# EAGLE board quadrotorDylan (EAGLE 5.06)
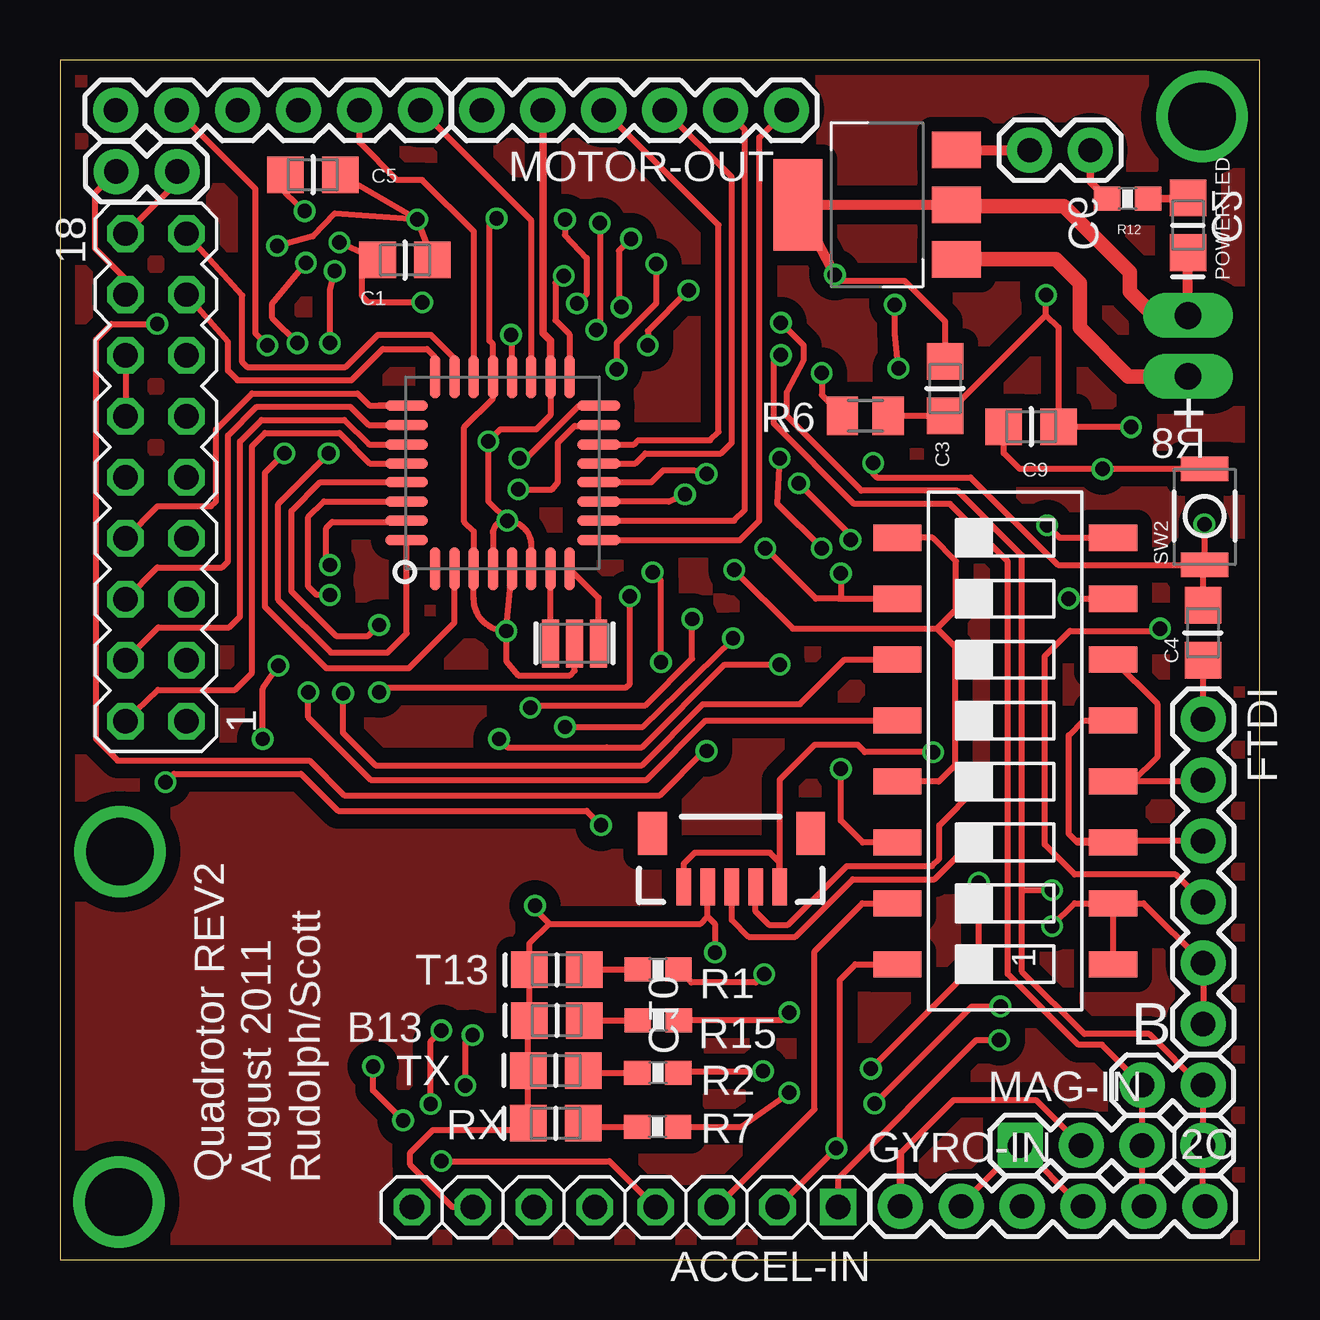
[diagram p0: board, top side]
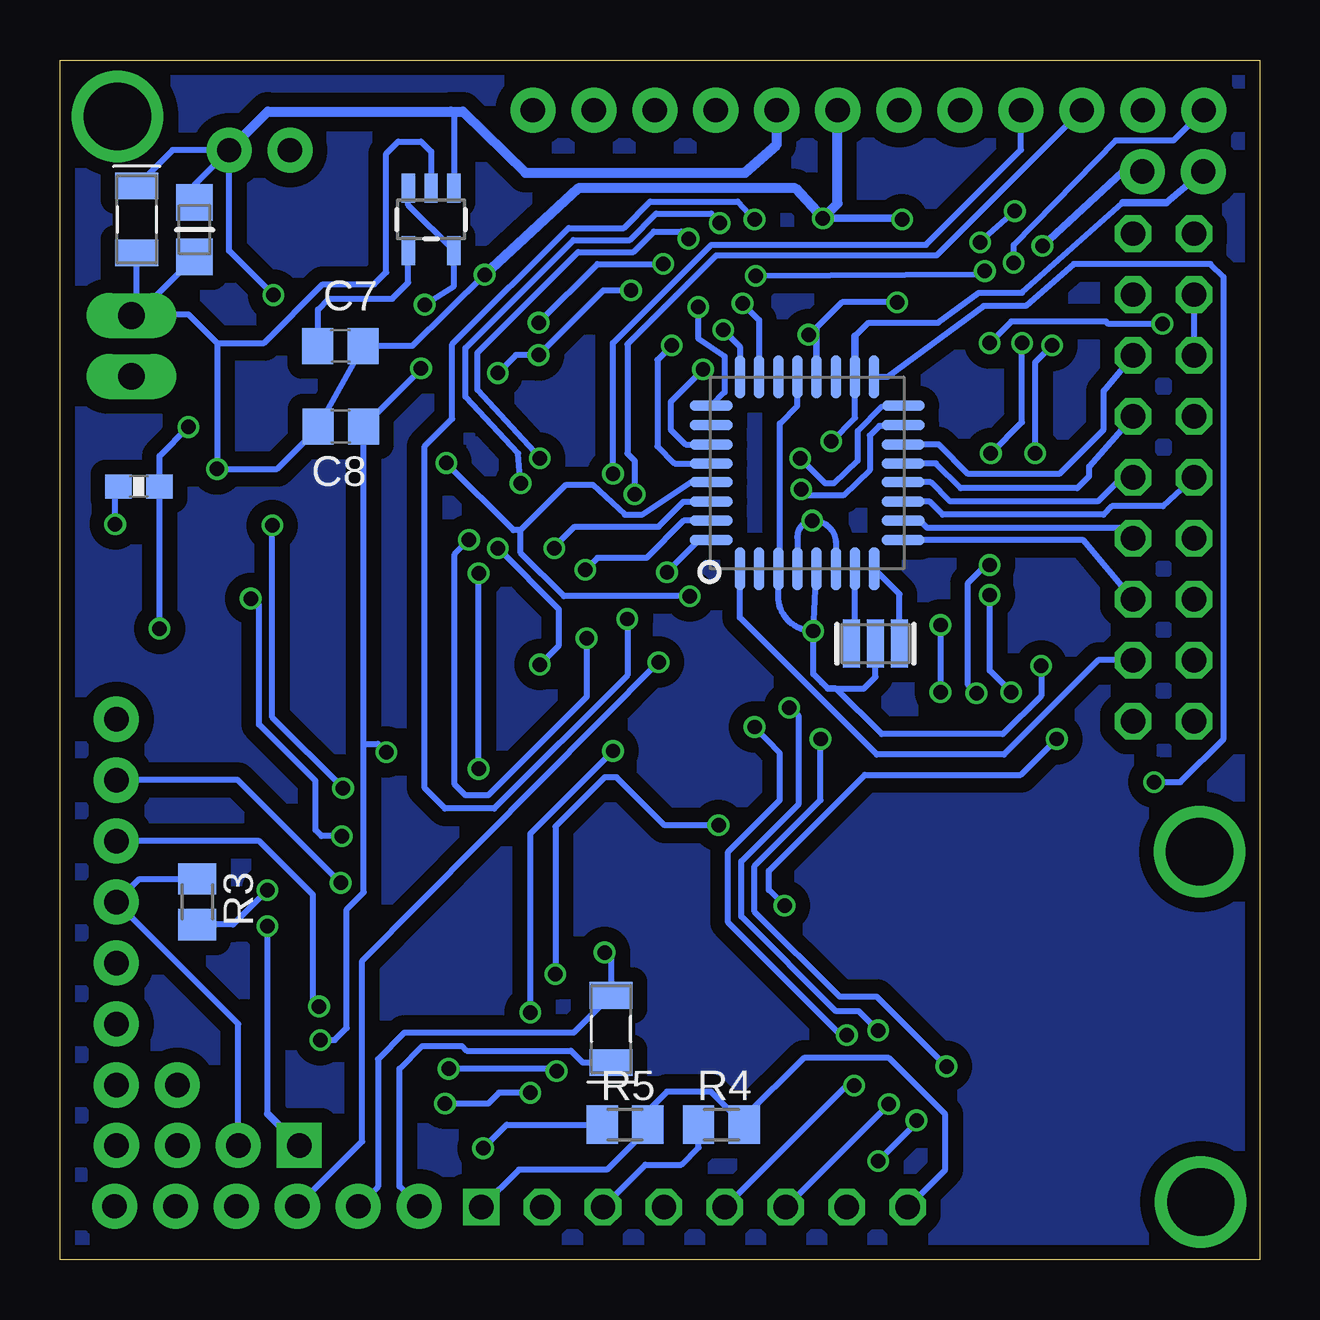
[diagram p1: board, bottom side, seen from below]

Size 50 x 50 mm. Coordinates in mm from the lower left corner, seen from the top.
Outline: 0,0 50,0 50,50 0,50 0,0
Copper layers (1*16): Top 0.035mm / dielectric 1.5mm / Bottom 0.035mm
Design rules "ITead_rule": minimum track width 6mil, minimum drill 12mil, track to track 6mil, track to pad 6mil, pad to pad 6mil, via to via 6mil, smd to smd 0mil, copper to edge 10mil, drill to drill 10mil, minimum pad ring 10mil, minimum via ring 6mil, stop-mask expansion 2mil, vias tented up to drill 100mil, thermal gap 10mil

## Footprints (pad centres in the part's own frame; a part is rotated, then mirrored left to right if it is on the bottom)
SOT223 = smd 1.524 x 2.032: 1 0,0; 2 2.286,0; 3 4.572,0 | smd 3.81 x 2.032: 4 2.286,6.604
1X08-S = drill 1.016 square: 1 -8.89,0 | drill 1.016 octagon: 2 -6.35,0; 3 -3.81,0; 4 -1.27,0; 5 1.27,0; 6 3.81,0; 7 6.35,0; 8 8.89,0
MA09-2 = drill 1.016 octagon: 1 -10.16,-1.27; 2 -10.16,1.27; 3 -7.62,-1.27; 4 -7.62,1.27; 5 -5.08,-1.27; 6 -5.08,1.27; 7 -2.54,-1.27; 8 -2.54,1.27; 9 0,-1.27; 10 0,1.27; 11 2.54,-1.27; 12 2.54,1.27; 13 5.08,-1.27; 14 5.08,1.27; 15 7.62,-1.27; 16 7.62,1.27; 17 10.16,-1.27; 18 10.16,1.27
CAP0805-NP = smd 1.524 x 1.524: 1 0,0; 2 2.286,0
TAN-A = smd 1.118 x 1.778: 1 0,0; 2 2.794,0
C0805 = smd 1.3 x 1.5: 1 -0.95,0; 2 0.95,0
LED0805 = smd 1.524 x 1.524: 1 0,0; 2 2.286,0
1X02_LONGPADS = drill 1.118 pad 1.88 long: 1 0,0; 2 2.54,0
1X06 = drill 1.016 pad 1.88 round: 1 0,0; 2 2.54,0; 3 5.08,0; 4 7.62,0; 5 10.16,0; 6 12.7,0
EM408_CON = smd 0.6 x 1.55: 1 4,0; 2 3,0; 3 2,0; 4 1,0; 5 0,0 | smd 1.2 x 1.8: P$1 -1.3,-2.225; P$2 5.3,-2.225
1X02 = drill 1.016 pad 1.88 round: 1 0,0; 2 2.54,0
1X04 = drill 1.016 pad 1.88 square: 1 0,0 | drill 1.016 pad 1.88 round: 2 2.54,0; 3 5.08,0; 4 7.62,0
0603-RES = smd 1.1 x 1: 1 -0.85,0; 2 0.85,0
M0805 = smd 1.3 x 1.6: 1 -0.95,0; 2 0.95,0
SMS-008 = smd 1.092 x 2.007: 1 -8.89,-4.496; 2 -6.35,-4.496; 3 -3.81,-4.496; 4 -1.27,-4.496; 5 1.27,-4.496; 6 3.81,-4.496; 7 6.35,-4.496; 8 8.89,-4.496; 9 8.89,4.496; 10 6.35,4.496; 11 3.81,4.496; 12 1.27,4.496; 13 -1.27,4.496; 14 -3.81,4.496; 15 -6.35,4.496; 16 -8.89,4.496
157SW = smd 1.016 x 1.981: 1 0,0; 2 4,0
QFP032 = smd 0.432 x 1.778: 1 0,0; 2 0.8,0; 3 1.599,0; 4 2.399,0; 5 3.199,0; 6 3.998,0; 7 4.798,0; 8 5.598,0; 17 5.588,8.001; 18 4.798,7.997; 19 3.998,7.997; 20 3.199,7.997; 21 2.399,7.997; 22 1.599,7.997; 23 0.799,7.997; 24 0,7.997 | smd 1.778 x 0.432: 9 6.807,1.194; 10 6.807,2.007; 11 6.807,2.794; 12 6.807,3.607; 13 6.807,4.394; 14 6.807,5.182; 15 6.807,5.994; 16 6.816,6.803; 25 -1.194,6.807; 26 -1.194,5.994; 27 -1.194,5.182; 28 -1.194,4.394; 29 -1.194,3.607; 30 -1.194,2.794; 31 -1.194,2.007; 32 -1.194,1.194
SOT23-5 = smd 0.55 x 1.2: 1 -0.95,-1.3; 2 0,-1.3; 3 0.95,-1.3; 4 0.95,1.3; 5 -0.95,1.3
RESONATOR = smd 0.7 x 2: 1 -1,0; 2 0,0; 3 1,0

## Placement (x,y rotation side)
5VREG  UA78M05  [SOT223]  37.36,41.68 90 top
ACCEL-IN  [1X08-S]  23.55,2.18 180 top
AUX-IO  [MA09-2]  4,32.6 90 top
C1  0.1uF  [CAP0805-NP]  13.24,41.66 0 top
C2  4.7uF  [TAN-A]  46.8,44.75 270 bottom
C3  0.1uF  [CAP0805-NP]  36.89,35.16 90 top
C4  0.1uF  [CAP0805-NP]  47.64,24.98 90 top
C5  0.1uF  [CAP0805-NP]  9.4,45.21 0 top
C6  0.1uF  [CAP0805-NP]  44.39,44.07 270 bottom
C7  470pF  [C0805]  38.31,38.08 0 bottom
C8  2.2uF  [C0805]  38.29,34.72 180 bottom
C9  0.1uF  [CAP0805-NP]  39.34,34.71 0 top
C10  4.7uF  [TAN-A]  27.03,8.21 90 bottom
COMM-LED  L_AMBER  [LED0805]  19.57,9.96 0 top
COMM-LED1  L_AMBER  [LED0805]  19.52,7.88 0 top
COMM-LED2  L_AMBER  [LED0805]  19.52,5.68 0 top
EXTERNAL-ON-OFF  [1X02_LONGPADS]  47.02,36.81 90 top
FTDI  [1X06]  47.65,22.52 270 top
GPS  EM408_CON  [EM408_CON]  30,15.54 180 top
GYRO-IN  [1X06]  35.02,2.22 0 top
I2C  [1X02]  47.65,7.27 180 top
JP1  [1X02]  40.41,46.24 0 top
MAG-IN  [1X04]  40.02,4.75 0 top
MOTOR-OUT  [1X06]  17.59,47.91 0 top
POWER-LED  BLUE  [LED0805]  47.02,41.97 90 top
R1  330  [0603-RES]  24.93,12.09 0 top
R2  330  [0603-RES]  24.92,7.79 0 top
R3  4.7k  [M0805]  44.28,14.91 90 bottom
R4  5k  [M0805]  22.43,5.62 0 bottom
R5  5k  [M0805]  26.45,5.62 0 bottom
R6  5k  [M0805]  33.57,35.17 0 top
R7  330  [0603-RES]  24.91,5.54 0 top
R8  1k  [0603-RES]  46.71,32.22 0 bottom
R12  330  [0603-RES]  44.5,44.22 0 top
R15  330  [0603-RES]  24.94,9.97 0 top
RECIEVER-POWER  [1X02]  4.88,45.35 180 top
RECIVER  [1X06]  15.03,47.91 180 top
S1  SWS008  [SMS-008]  39.4,21.2 90 top
SENSOR-LED2  L_AMBER  [LED0805]  19.57,12.08 0 top
SW2  RESET  [157SW]  47.71,28.96 90 top
U1  ATMEGA168-20AU  [QFP032]  15.64,28.79 0 top
U2  V_REG_LDOSMD  [SOT23-5]  34.53,43.35 180 bottom
U4  ATMEGA168-20AU  [QFP032]  21.66,28.79 0 bottom
Y1  16MHz  [RESONATOR]  21.45,25.68 0 top
Y2  16MHz  [RESONATOR]  16.01,25.67 0 bottom

## Library data of the parts
5VREG C1-C6 C9 C10 COMM-LED COMM-LED1 COMM-LED2 POWER-LED SENSOR-LED2 SW2 U1 U4 = MySMD
ACCEL-IN = pinhead-2
AUX-IO = con-lstb; OC_FARNELL: unknown; OC_NEWARK: unknown
C7 C8 = rcl
EXTERNAL-ON-OFF FTDI GPS GYRO-IN I2C JP1 MAG-IN MOTOR-OUT R1 R2 R7 R8 R12 R15 RECIEVER-POWER RECIVER U2 = SparkFun
R3-R6 = resistor
S1 = smd-special
Y1 Y2 = MySMD2

## Nets
2D13/SCK: R15.2 U1.17
3V3: ACCEL-IN.1 ACCEL-IN.8 C8.1 GPS.1 GPS.5 R4.2 R5.2 U2.3 U2.5
+5V: AUX-IO.12 AUX-IO.14 AUX-IO.16 C2.1 C3.1 C6.1 C9.2 C10.1 FTDI.4 GYRO-IN.1 JP1.2 MAG-IN.2 MOTOR-OUT.2 R3.2 R6.2 R8.2 R12.1 RECIEVER-POWER.2 U1.4 U1.6 U1.18 U2.1 U4.4 U4.6 U4.18
AAUX1: U4.26
AAUX2: U4.19
AAUX3: U4.22
AAUX4: AUX-IO.17 U1.23
AAUX5: AUX-IO.15 U1.24
AAUX6: AUX-IO.8 U1.25
AAUX7: AUX-IO.6 U1.26
AAUX8: AUX-IO.4 U1.27
AAUX9: AUX-IO.2 U1.28
AAUX10: AUX-IO.10 U4.11
AAUX11: U4.2
ACCEL-X: ACCEL-IN.6 U4.23
ACCEL-Y: ACCEL-IN.5 U4.24
ACCEL-Z: ACCEL-IN.4 U4.25
AREF: C1.1 C5.1 U1.20 U4.20
COM: 5VREG.2 5VREG.4 ACCEL-IN.7 AUX-IO.18 C1.2 C2.2 C3.2 C5.2 C6.2 C7.2 C8.2 C9.1 C10.2 COMM-LED1.1 COMM-LED2.1 COMM-LED.1 EXTERNAL-ON-OFF.2 FTDI.5 FTDI.6 GPS.2 GYRO-IN.2 GYRO-IN.4 MAG-IN.1 MOTOR-OUT.1 POWER-LED.1 RECIEVER-POWER.1 S1.1 S1.2 SENSOR-LED2.1 SW2.2 U1.3 U1.5 U1.21 U2.2 U4.3 U4.5 U4.21 Y1.2 Y2.2
D2-CH1: RECIVER.6 U1.32
D2-INT: GYRO-IN.3 U4.32
D4-CH2: RECIVER.5 U1.2
D5-M1: MOTOR-OUT.6 U1.9
D6-M2: MOTOR-OUT.5 U1.10
D7-CH3: RECIVER.4 U1.11
D7-CH5: U1.1
D8-CH4: RECIVER.3 U1.12
D9-M3: MOTOR-OUT.4 U1.13
D10-M4: MOTOR-OUT.3 U1.14
D11/MOSI: U1.15 U4.15
D12/MISO: U1.16 U4.16
D13/SCK: R1.2 U4.17
D19-CH6: RECIVER.1 U1.19
D20-CH5: RECIVER.2 U1.22
DAUX1: AUX-IO.5 U4.9
DAUX2: AUX-IO.7 U4.10
DAUX3: AUX-IO.3 U4.1
DAUX4: AUX-IO.9 U4.12
DAUX5: AUX-IO.11 U4.13
DAUX6: AUX-IO.13 U4.14
DAUX7: AUX-IO.1
DTR: C4.1 FTDI.1
GPS-RX: GPS.4 S1.8
GPS-TX: GPS.3 S1.7
N$1: U1.8 Y1.3
N$2: U1.7 Y1.1
N$3: R1.1 SENSOR-LED2.2
N$4: 5VREG.3 JP1.1
N$5: 5VREG.1 EXTERNAL-ON-OFF.1
N$7: COMM-LED.2 R15.1
N$9: COMM-LED1.2 R2.1
N$10: COMM-LED2.2 R7.1
N$28: POWER-LED.2 R12.2
N$30: U4.7 Y2.1
N$32: U4.8 Y2.3
N$34: ACCEL-IN.3 R4.1 S1.15
N$36: ACCEL-IN.2 R5.1 S1.16
N$41: C7.1 U2.4
RESET2: C4.2 R8.1 SW2.1 U1.29 U4.29
RX: S1.12 U1.30
RX2: S1.10 S1.14 U4.30
RX-IN: FTDI.3 R7.2 S1.3 S1.5
SCL: GYRO-IN.6 I2C.1 MAG-IN.4 R3.1 U4.27
SDA: GYRO-IN.5 I2C.2 MAG-IN.3 R6.1 U4.28
TX: S1.11 U1.31
TX2: S1.9 S1.13 U4.31
TX-IN: FTDI.2 R2.2 S1.4 S1.6

## Tracks (layer width: path | path; a pad name or v marks a point on that pad's centre or on a via)
2D13/SCK  (via drill 0.6)
  Top 0.254: U1.17 21.23,38.57 20.65,39.15 20.65,40.7 v21,41 | v11.45,41.2 11.25,40.4 v11.25,38.2 | v4.05,39 2.15,39 1.5,38.35 1.5,21.7 2.4,20.8 10.4,20.8 11.85,19.35 25,19.35 26.85,21.2 v26.95,21.2 | v30.4,10.3 30.07,9.97 R15.2
  Bottom 0.254: v21,41 11.65,41.05 v11.45,41.2 | v11.25,38.2 10.35,39.1 6.4,39.1 6.3,39 v4.05,39 | v26.95,21.2 30.4,17.75 v30.4,10.3
3V3  (via drill 0.6)
  Top 0.254: ACCEL-IN.1 32.45,3.4 38.2,9.15 v39.15,9.15 | v34.95,37.15 34.8,38.6 v34.8,39.8 | GPS.1 26,16.5 26.45,16.95 29.6,16.95 30,16.55 GPS.5 30,20 31.45,21.45 33.25,21.45 33.55,21.15 v36.4,21.15
  Bottom 0.254: U2.3 35.48,43.95 U2.5 33.58,40.58 v34.8,39.8 | 37.34,21.5 37.34,15.31 38.05,14.6 38.05,9.65 38.55,9.15 v39.15,9.15 | 37.34,21.5 C8.1 34.95,37.11 v34.95,37.15 | ACCEL-IN.8 13.1,3.75 13.1,6.05 15.45,8.4 19,8.4 21.48,5.92 R4.2 22.86,7 24.7,7 25.5,6.2 R5.2 25.5,5.45 27.2,3.75 30.88,3.75 ACCEL-IN.1 | v36.4,21.15 36.75,21.5 37.34,21.5
+5V  (via drill 0.6)
  Top 0.254: 35.02,4.42 37.25,6.65 40.67,6.65 MAG-IN.2 | U1.4 18.04,30.29 arc-90 v18.65,30.8 | v18.65,30.8 arc-90 19.64,29.71 U1.6 | v18.65,30.8 17.85,31.6 v17.85,34.1 18.35,34.6 19.85,34.6 20.44,35.19 U1.18 | R6.2 C3.1 41.1,39.37 | 41.1,39.37 v41.1,40.2 | 41.1,39.37 41.63,38.84 C9.2 v44.65,34.7 | FTDI.4 46.5,16.05 42.3,16.05 41.05,17.3 41.05,25.15 42.1,26.2 45.75,26.2 v45.85,26.3 | AUX-IO.14 AUX-IO.12 | AUX-IO.16 2.73,40.87 1.45,42.15 1.45,44.45 RECIEVER-POWER.2
  Top 0.305: GYRO-IN.1 35.02,4.42 | MOTOR-OUT.2 20.12,38.62 20.45,38.3 U1.18 | JP1.2 42.95,44.92 R12.1
  Bottom 0.254: MAG-IN.2 42.56,9.81 FTDI.4 46.69,15.86 R3.2 | JP1.2 45.31,46.24 C2.1 | U4.4 19.26,30.09 arc90 v18.65,30.8 arc90 17.66,29.91 U4.6 | v17.85,34.1 16.86,35.09 U4.18 | U2.1 33.58,47.85 33.7,47.85 | 16.86,38.49 16.3,39.05 13.4,39.05 11.7,40.3 9.9,40.3 5.7,44.05 | JP1.2 44.39,44.8 C6.1 | v41.1,40.2 42.95,42.05 JP1.2 | v45.85,26.3 45.85,32.35 | 45.85,32.35 45.85,33.5 v44.65,34.7 | C10.1 28.21,8.21 28.7,8.7 33.05,8.7 33.25,8.9 34.9,8.9 35.85,7.95 35.85,3.04 GYRO-IN.1 | R8.2 45.85,32.35 | AUX-IO.16 AUX-IO.14
  Bottom 0.305: RECIEVER-POWER.2 3.9,44.05 5.7,44.05 | U4.18 16.86,38.49
  Bottom 0.406: JP1.2 41.34,47.85 33.7,47.85 33.2,47.85 30.6,45.3 21.45,45.3 20.12,46.47 MOTOR-OUT.2
AAUX4
  Top 0.254: U1.23 16.44,37.56 15.45,38.55 13.25,38.55 11.9,37.2 7.8,37.2 7.6,37.4 7.6,40.18 AUX-IO.17
AAUX5
  Top 0.254: AUX-IO.15 7,38.24 7,37.05 7.4,36.65 12.15,36.65 13.45,37.95 15.3,37.95 15.6,37.65 15.6,36.83 U1.24
AAUX6
  Top 0.254: AUX-IO.8 4.07,31.4 6.3,31.4 6.5,31.6 6.5,34.6 8,36.1 12.4,36.1 12.9,35.6 13.8,35.6 | 13.8,35.6 U1.25 | 13.8,35.6 13.3,35.6
AAUX7
  Top 0.254: AUX-IO.6 4.06,28.85 6.75,28.85 7,29.1 7,34.35 8.2,35.55 12.1,35.55 12.87,34.78 U1.26
AAUX8
  Top 0.254: AUX-IO.4 4.1,26.35 7.05,26.35 7.5,26.8 7.5,34.1 8.4,35 11.85,35 12.88,33.97 U1.27
AAUX9
  Top 0.254: AUX-IO.2 4.09,23.75 7.3,23.75 8,24.45 8,33.9 8.55,34.45 11.65,34.45 12.92,33.18 U1.28
AAUX10
  Bottom 0.254: AUX-IO.10 4.03,31.4 6.15,31.4 6.5,31.05 13.2,31.05 13.73,31.58 U4.11
ACCEL-X  (via drill 0.6)
  Top 0.254: v21.55,39.85 21.95,40.25 21.95,41.75 21.05,42.7 v21.05,43.35 | v26.35,26.7 26.35,25.05 24.4,23.1 19.85,23.1 arc90 v19.6,23 | v15.9,9.55 15.45,9.1 v15.45,6.47
  Bottom 0.254: U4.23 20.86,39.16 v21.55,39.85 | v21.05,43.35 21.75,44.1 25.4,44.1 26.5,43 28.8,43 33.65,38.15 33.65,35.05 34.8,33.9 34.8,19.65 33.95,18.8 31.9,18.8 26.35,24.35 v26.35,26.7 | ACCEL-IN.6 v15.45,6.47 | v19.6,23 19.2,22.65 19.2,19 21.6,16.6 21.6,14.3 17.65,10.35 16.7,10.35 v15.9,9.55
ACCEL-Y  (via drill 0.6)
  Top 0.254: v22.35,38.75 22.5,38.9 v22.5,43.2 | v30.8,32.35 32.95,30.2 v32.95,30 | v28.05,25.9 28.05,25.85 24.3,22.2 v21.05,22.2 | v17.2,9.35 16.9,9.05 v16.9,7.25
  Bottom 0.254: U4.24 21.66,38.06 v22.35,38.75 | v22.5,43.2 22.85,43.6 25.15,43.6 26.25,42.5 28.6,42.5 33.1,38 33.1,35.95 30.9,33.6 v30.8,32.35 | v32.95,30 33.55,29.4 33.55,19.8 33.1,19.35 32.15,19.35 28.05,23.45 v28.05,25.9 | ACCEL-IN.5 17.21,7.25 v16.9,7.25 | v21.05,22.2 20,21.1 20,19.15 22.15,17 22.15,14.05 17.45,9.35 v17.2,9.35
ACCEL-Z  (via drill 0.6)
  Top 0.254: v23.8,42.55 23.3,42.05 23.3,39.8 v23.4,39.7 | v30,33.4 29.9,31.5 v31.75,29.65 | v30,24.8 27.7,24.8 24.25,21.35 22.8,21.35 18.65,21.35 v18.3,21.7 | ACCEL-IN.4 22.91,4.1 v15.9,4.1 | v14.3,5.8 13.15,6.95 13.05,7.05 v13.05,8.05
  Bottom 0.254: U4.25 22.3,36.15 22.3,37.65 23.4,38.4 v23.4,39.7 | v23.8,42.55 24.1,42.85 25.25,42.85 26.1,42 28.4,42 32.6,37.8 32.6,36.25 v30,33.4 | v31.75,29.65 29.2,27.1 29.2,25.6 v30,24.8 | v15.9,4.1 14.3,5.7 v14.3,5.8 | v18.3,21.7 18.3,19.15 21.05,16.4 21.05,14.5 17.5,10.95 15.95,10.95 v13.05,8.05
AREF  (via drill 0.6)
  Top 0.254: v18.8,38.55 U1.20 | v15.1,39.9 12.85,39.9 12.6,40.15 12.6,41.4 C1.1 v11.65,42.4 | v10.2,43.7 9.4,44.45 C5.1
  Bottom 0.254: v18.8,38.55 18.46,38.31 U4.20 18.46,38.84 17.4,39.9 v15.1,39.9 | v11.65,42.4 v10.2,43.7
COM  (via drill 0.6)
  Top 0.254: 47.65,10.05 FTDI.5 45.16,14.85 S1.2 | S1.2 S1.1 | 42.56,2.22 MAG-IN.1 37.56,2.29 | v41.35,13.9 42.3,14.85 S1.2 | 5VREG.2 37.38,43.95 | SW2.2 v43.46,32.96 v43.45,32.95 40,32.95 39.34,33.61 C9.1 | v18.6,26.2 arc-90 17.24,27.56 U1.3 17.25,30.35 16.85,30.75 16.85,34.7 18.04,35.89 U1.21 18.04,38.16 17.9,38.3 17.9,43.1 v18.2,43.4 18.04,43.24 | v18.6,26.2 U1.5 | v14.9,43.35 C5.2 | v14.9,43.35 14.88,43.35 C1.2 | v9.05,42.25 10.55,42.65 11.45,43.6 v14.9,43.35 | Y1.2 21.45,24.55 21.25,24.35 19.1,24.35 18.6,24.95 v18.6,26.2 | C3.2 36.89,39.11 35.2,40.8 32.55,40.8 v32.3,41.05 | 20.4,14 19.57,13.17 SENSOR-LED2.1 COMM-LED.1 19.52,9.91 COMM-LED1.1 COMM-LED2.1 19.24,5.4 15.55,5.4 14.6,4.45 14.6,3.95 16.37,2.18 ACCEL-IN.7 | 20.4,14 26.7,14 27,14.29 | 27,14.29 GPS.2 | 27,14.29 27.3,13.99 v27.3,12.8 | v9.1,24.75 8.45,23.8 v8.45,21.7 | v19.8,14.75 19.8,14.6 20.4,14 | RECIEVER-POWER.1 4.88,44.91 AUX-IO.18
  Top 0.305: FTDI.6 47.7,9.87 47.7,10 47.65,10.05 | 42.56,2.22 GYRO-IN.4 | GYRO-IN.2 37.56,2.29
  Top 0.406: EXTERNAL-ON-OFF.2 POWER-LED.1 | 5VREG.2 5VREG.4 31.41,42.74 v32.3,41.05
  Top 0.61: 5VREG.2 37.43,43.9 41.85,43.9 44.6,41.15 44.6,40.35 45.6,39.35 EXTERNAL-ON-OFF.2
  Bottom 0.254: 41.35,6.08 v41.35,13.9 | 43.45,38.2 v43.45,32.95 40.95,32.95 39.2,34.7 | 43.45,38.2 44.65,39.4 46.97,39.4 EXTERNAL-ON-OFF.2 | C2.2 46.8,39.57 EXTERNAL-ON-OFF.2 | v18.6,26.2 U4.5 | v18.6,26.2 arc90 20.06,27.66 U4.3 20,28.85 20,34.85 19.26,35.59 U4.21 | 14.95,43.4 v14.9,43.35 | U2.2 34.53,46.18 34.95,46.6 35.9,46.6 36.4,46.1 36.4,41.15 36.9,40.65 39.05,40.65 41.5,38.2 43.45,38.2 | v32.3,41.05 35.32,38.08 C7.2 C8.2 | Y2.2 16.01,24.29 16.5,23.8 18,23.8 | 18,23.8 18.6,24.4 v18.6,26.2 | C6.2 46.82,39.35 EXTERNAL-ON-OFF.2 | v27.3,12.8 27.03,12.53 C10.2 28.58,9.45 35.65,9.45 36.75,8.35 36.75,3.04 GYRO-IN.2 | 18,23.8 18.25,24.05 | v8.45,21.7 9.95,20.2 16.45,20.2 20.45,16.2 20.45,15.4 v19.8,14.75 | 18,23.8 17.65,23.8 15.75,21.9 10.7,21.9 9.1,23.5 v9.1,24.75
  Bottom 0.305: MAG-IN.1 41.35,6.08 | v18.2,43.4 14.95,43.4 | RECIEVER-POWER.1 5.7,45.35 v9.05,42.25
  Bottom 0.406: MOTOR-OUT.1 17.59,44.02 v18.2,43.4 19.35,44.65 28.4,44.65 v32.3,41.05
D2-CH1  (via drill 0.6)
  Top 0.254: v11.2,33.6 9.1,31.5 9.1,27.5 11.3,25.3 13.65,25.3 14.45,26.1 U1.32 | v10.25,41.55 8.85,39.85 8.85,39.25 v9.9,38.2
  Bottom 0.254: RECIVER.6 3.58,46.65 6,46.65 10.25,42.3 v10.25,41.55 | v11.2,33.6 9.9,34.9 v9.9,38.2
D2-INT  (via drill 0.6)
  Top 0.254: v24.7,28.65 25.05,28.3 v25.05,24.9
  Bottom 0.254: U4.32 23.37,29.98 v24.7,28.65 | v25.05,24.9 37.4,12.45 37.4,4.92 GYRO-IN.3
D4-CH2  (via drill 0.6)
  Top 0.254: RECIVER.5 8.15,44.62 8.15,38.6 v8.65,38.1 | v9.35,33.6 8.55,32.8 8.55,27.2 11.1,24.65 14.55,24.65 16.45,26.55 U1.2
  Bottom 0.254: v8.65,38.1 9.35,37.4 v9.35,33.6
D5-M1
  Top 0.254: MOTOR-OUT.6 29.15,46.77 29.15,30.8 28.33,29.98 U1.9
D6-M2
  Top 0.254: MOTOR-OUT.5 28.55,47.1 28.55,31.25 28.1,30.8 U1.10
D7-CH3  (via drill 0.6)
  Top 0.254: v26.05,31.9 25.38,31.58 U1.11
  Bottom 0.254: v26.05,31.9 26.05,33.3 26.35,33.6 26.35,38.15 22.65,41.85 13.46,41.85 RECIVER.4
D8-CH4  (via drill 0.6)
  Top 0.254: v26.95,32.75 26.4,32.9 25.15,32.9 24.65,32.4 U1.12
  Bottom 0.254: RECIVER.3 9.95,46.26 13.9,42.3 22.85,42.3 26.95,38.2 v26.95,32.75
D9-M3
  Top 0.254: MOTOR-OUT.4 28,45.11 28,34.05 27.55,33.6 24.4,33.6 23.98,33.18 U1.13
D10-M4
  Top 0.254: MOTOR-OUT.3 27.45,43.12 27.45,34.5 27.1,34.15 24.1,34.15 23.92,33.97 U1.14
D11/MOSI  (via drill 0.6)
  Top 0.254: v19.1,32.1 20.5,32.1 20.75,32.4 20.75,34.05 21.45,34.75 22.42,34.75 U1.15
  Bottom 0.254: U4.15 15.22,34.78 15.25,34.75 15.85,34.75 16.25,34.35 16.25,32.9 17.35,31.85 18.9,31.85 v19.1,32.1
D12/MISO  (via drill 0.6)
  Top 0.254: v19.15,33.4 19.45,33.4 21.64,35.59 U1.16
  Bottom 0.254: U4.16 15.76,35.54 16.75,34.55 16.75,33.3 17.75,32.35 18.1,32.35 v19.15,33.4
D13/SCK  (via drill 0.6)
  Top 0.254: v4.4,19.9 4.75,20.25 10.05,20.25 11.6,18.7 21.95,18.7 v22.55,18.1 | v29.35,11.9 29,11.55 26.32,11.55 R1.2
  Bottom 0.254: U4.17 15.51,36.79 11.5,39.75 9.75,39.75 7.75,41.5 2.05,41.5 1.5,40.95 1.5,21.7 3.3,19.9 v4.4,19.9 | v22.55,18.1 24.8,18.1 26.8,20.1 27.3,20.1 29.35,18.05 v29.35,11.9
D19-CH6
  Top 0.254: RECIVER.1 15.04,47.91 19.65,43.3 U1.19
D20-CH5
  Top 0.254: RECIVER.2 12.48,46.56 14.05,45 15.1,45 17.25,42.85 U1.22
DAUX1
  Bottom 0.254: AUX-IO.5 5.32,27.57 7.33,29.98 U4.9
DAUX2
  Bottom 0.254: AUX-IO.7 5.76,30.5 13.85,30.5 14.15,30.8 U4.10
DAUX3
  Bottom 0.254: AUX-IO.3 6.72,24.98 10.65,21.05 15.95,21.05 21.66,26.76 U4.1
DAUX4
  Bottom 0.254: AUX-IO.9 5.75,32.6 6.75,31.6 12.9,31.6 13.7,32.4 15.25,32.4 U4.12
DAUX5
  Bottom 0.254: AUX-IO.11 7.1,33.06 7.1,32.65 7.6,32.15 12.45,32.15 13.48,33.18 U4.13
DAUX6
  Bottom 0.254: AUX-IO.13 6.5,36.2 6.5,34.6 8.35,32.75 12.15,32.75 13.37,33.97 U4.14
DTR
  Top 0.254: FTDI.1 C4.1
GPS-RX  (via drill 0.6)
  Top 0.254: S1.8 41.66,30.09 v41.15,30.6 | v38.2,19.65 36.65,18.1 36.65,16.7 36.35,16.4 32.8,16.4 30.35,13.95 29.55,13.95 29,14.51 GPS.4
  Bottom 0.254: v41.15,30.6 41.15,22.6 v38.2,19.65
GPS-TX  (via drill 0.6)
  Top 0.254: S1.7 v42.05,27.55 | v38.25,17.65 36.45,15.85 33.05,15.85 30.65,13.45 28.7,13.45 28,14.15 GPS.3
  Bottom 0.254: v42.05,27.55 41.7,27.3 41.7,22.3 39.35,19.95 39.35,17.9 39.1,17.65 v38.25,17.65
N$1
  Top 0.254: U1.8 22.45,27.58 Y1.3
N$2
  Top 0.254: U1.7 Y1.1
N$3
  Top 0.254: R1.1 SENSOR-LED2.2
N$4
  Top 0.254: 5VREG.3 arc90 37.37,46.24
  Top 0.406: 37.37,46.24 JP1.1
N$5
  Top 0.254: 5VREG.1 37.43,41.75
  Top 0.61: 5VREG.1 37.38,41.7 41.5,41.7 42.5,40.7 42.5,38.85 44.54,36.81 EXTERNAL-ON-OFF.1
N$6  (via drill 2.8)
  other vias: 47.6,47.65
N$7
  Top 0.254: 21.95,10.05 COMM-LED.2 R15.1
N$8  (via drill 2.8)
  other vias: 2.45,2.4
N$9
  Top 0.254: R2.1 21.9,7.79 COMM-LED1.2
N$10
  Top 0.254: R7.1 21.95,5.54 COMM-LED2.2
N$11  (via drill 2.8)
  other vias: 2.5,17
N$12
  pour Bottom (isolate 0.61): 0.05,50 50,50 50,-0.1 0.05,-0.1
N$13
  pour Top (isolate 0.61): 0,50 50,50 50,0 0,0
N$28
  Top 0.254: 47,43.83 POWER-LED.2 46.98,44.22
  Top 0.305: R12.2 46.98,44.22
N$30
  Bottom 0.254: U4.7 16.86,25.67 Y2.1
N$32
  Bottom 0.254: U4.8 15.01,27.74 Y2.3
N$34
  Top 0.254: S1.15 33.45,14.85 31.45,12.85 31.45,6.26 ACCEL-IN.3
  Bottom 0.254: R4.1 23.38,4.67 24.1,3.95 25.59,3.95 ACCEL-IN.3
N$36  (via drill 0.6)
  Top 0.254: S1.16 33.16,12.3 32.5,11.65 32.5,4.78 v32.36,4.64 ACCEL-IN.2
  Bottom 0.254: R5.1 31.38,5.62 v32.36,4.64
N$41
  Bottom 0.254: U2.4 35.48,40.72 36.15,40.05 38.8,40.05 39.25,39.6 C7.1
RESET2  (via drill 0.6)
  Top 0.254: U1.29 10.85,32.4 9.65,31.2 9.65,27.85 11.5,26 12.85,26 v13.3,26.45 | 47.64,28.89 SW2.1 v47.71,30.64 v47.7,30.65 | 47.64,28.89 C4.2 | 47.64,28.89 47.58,28.95 41.6,28.95 37.95,32.6 34.05,32.6 33.9,32.75 v33.9,33.2 | v23.75,27.65 23.75,24 23.6,23.85 13.5,23.85 v13.3,23.65
  Bottom 0.254: v13.3,26.45 v13.3,23.65 | v23.75,27.65 29,27.65 30.8,29.45 30.8,30.4 | 30.8,30.4 28.9,32.3 27.8,32.3 26.45,31.05 25.75,31.05 23.7,32.4 U4.29 | v33.9,33.2 31.1,30.4 30.8,30.4 | R8.1 47.7,32.08 v47.7,30.65
RX  (via drill 0.6)
  Top 0.254: U1.30 14.44,31.6 11,31.6 10.35,30.95 10.35,28.05 10.7,27.7 v11.25,27.7 | v10.35,23.65 10.35,22.6 12.95,20 24.45,20 26.91,22.46 S1.12
  Bottom 0.254: v11.25,27.7 11.25,24.55 v10.35,23.65
RX2  (via drill 0.6)
  Top 0.254: v29.4,29.65 31.5,27.55 32.45,27.55 | 32.45,27.55 S1.10 | S1.14 33.47,17.39 32.55,18.3 v32.55,20.45 | v32.55,28.6 32.55,27.64 32.45,27.55
  Bottom 0.254: U4.30 24.02,31.58 25.05,30.55 28.55,30.55 29.4,29.7 v29.4,29.65 | v32.55,20.45 v32.55,28.6
RX-IN  (via drill 0.6)
  Top 0.254: S1.5 42.66,22.46 42.05,21.85 42.05,17.75 | 42.05,17.75 42.41,17.39 S1.3 43.95,17.44 | v39.2,10.55 38,10.55 v33.95,6.5 | v30.4,6.95 28.39,5.54 R7.2 | 42.05,17.75 42.36,17.44 FTDI.3
  Bottom 0.254: FTDI.3 41.69,17.44 39.45,15.2 39.45,10.8 v39.2,10.55 | v33.95,6.5 32.15,6.5 31.7,6.95 v30.4,6.95
SCL  (via drill 0.6)
  Top 0.254: 47.65,2.3 MAG-IN.4 | MAG-IN.4 I2C.1 47.53,7.27 45.4,9.4 42.7,9.4 40.1,12 40.1,15.3 | v30.05,39.05 31,38.1 31,37.5 30.3,36.15 30.3,35.15 33.4,32.05 37.4,32.05 40.1,29.35 40.1,15.3 | v41.35,15.4 40.2,15.4 40.1,15.3 | v23.2,37.1 23.2,38.2 24.85,39.85 v24.85,41.5
  Top 0.305: GYRO-IN.6 47.65,2.3 | MAG-IN.4
  Bottom 0.254: U4.27 23.92,33.97 24.55,34.6 24.55,35.75 v23.2,37.1 | v24.85,41.5 27.6,41.5 v30.05,39.05 | R3.1 42.79,13.96 v41.35,15.4
SDA  (via drill 0.6)
  Top 0.254: 45.1,2.3 MAG-IN.3 | MAG-IN.3 I2C.2 43.43,8.95 42.45,8.95 39.5,11.9 39.5,29.1 37.1,31.5 33.1,31.5 29.75,34.85 29.75,37.4 v30.05,37.7 | v24.5,38.1 24.5,38.7 v26.2,40.4 | R6.1 31.75,36.04 v31.75,36.95
  Top 0.305: GYRO-IN.5 45.1,2.3 | MAG-IN.3
  Bottom 0.254: U4.28 24.38,33.18 25.1,33.9 25.1,37.5 v24.5,38.1 | v26.2,40.4 27.35,40.4 v30.05,37.7 31,37.7 v31.75,36.95
TX  (via drill 0.6)
  Top 0.254: U1.31 14.15,30.8 14.1,30.75 11.35,30.75 11.1,30.5 11.1,29.1 v11.25,28.95 | v11.8,23.6 11.8,21.95 13.15,20.6 24.25,20.6 26.8,23.15 30.85,23.15 32.7,25 S1.11
  Bottom 0.254: v11.25,28.95 11.4,28.95 12.15,28.2 12.15,23.95 v11.8,23.6
TX2  (via drill 0.6)
  Top 0.254: v28.1,28.75 30.55,26.3 36.55,26.3 | 36.55,26.3 37.35,27.1 37.35,29.1 36.37,30.09 S1.9 | 36.55,26.3 37.3,25.55 37.3,20.6 36.62,19.93 S1.13
  Bottom 0.254: U4.31 24,30.8 25.55,29.25 27.6,29.25 v28.1,28.75
TX-IN  (via drill 0.6)
  Top 0.254: v38.3,15.7 38.3,12.45 v33.8,7.95 | v29.3,7.85 25.83,7.85 R2.2 | S1.6 45.75,23.15 45.75,20.95 44.73,19.93 S1.4 47.59,19.93 FTDI.2
  Bottom 0.254: v38.3,15.7 42.6,20 47.63,20 FTDI.2 | v33.8,7.95 29.4,7.95 v29.3,7.85

## Text on the board
_tsilk: C6 | C2 | + | R8 | C10 | R1 | T13 | B13 | R15 | B | TX | R2 | RX | R7 | Quadrotor REV2 | August 2011 | Rudolph/Scott